# Altium PCB MXCHIP.PcbDoc
Units mil, origin at the board's own origin, x right, y up, seen from the top; angles counter-clockwise.
Board outline 1527.56 x 1062.99 mil, 2 copper layers (Top Layer, Bottom Layer); 16 components, 14 nets, 69 pads, 11 vias.
Unrouted connection lines stored in the file: 1.
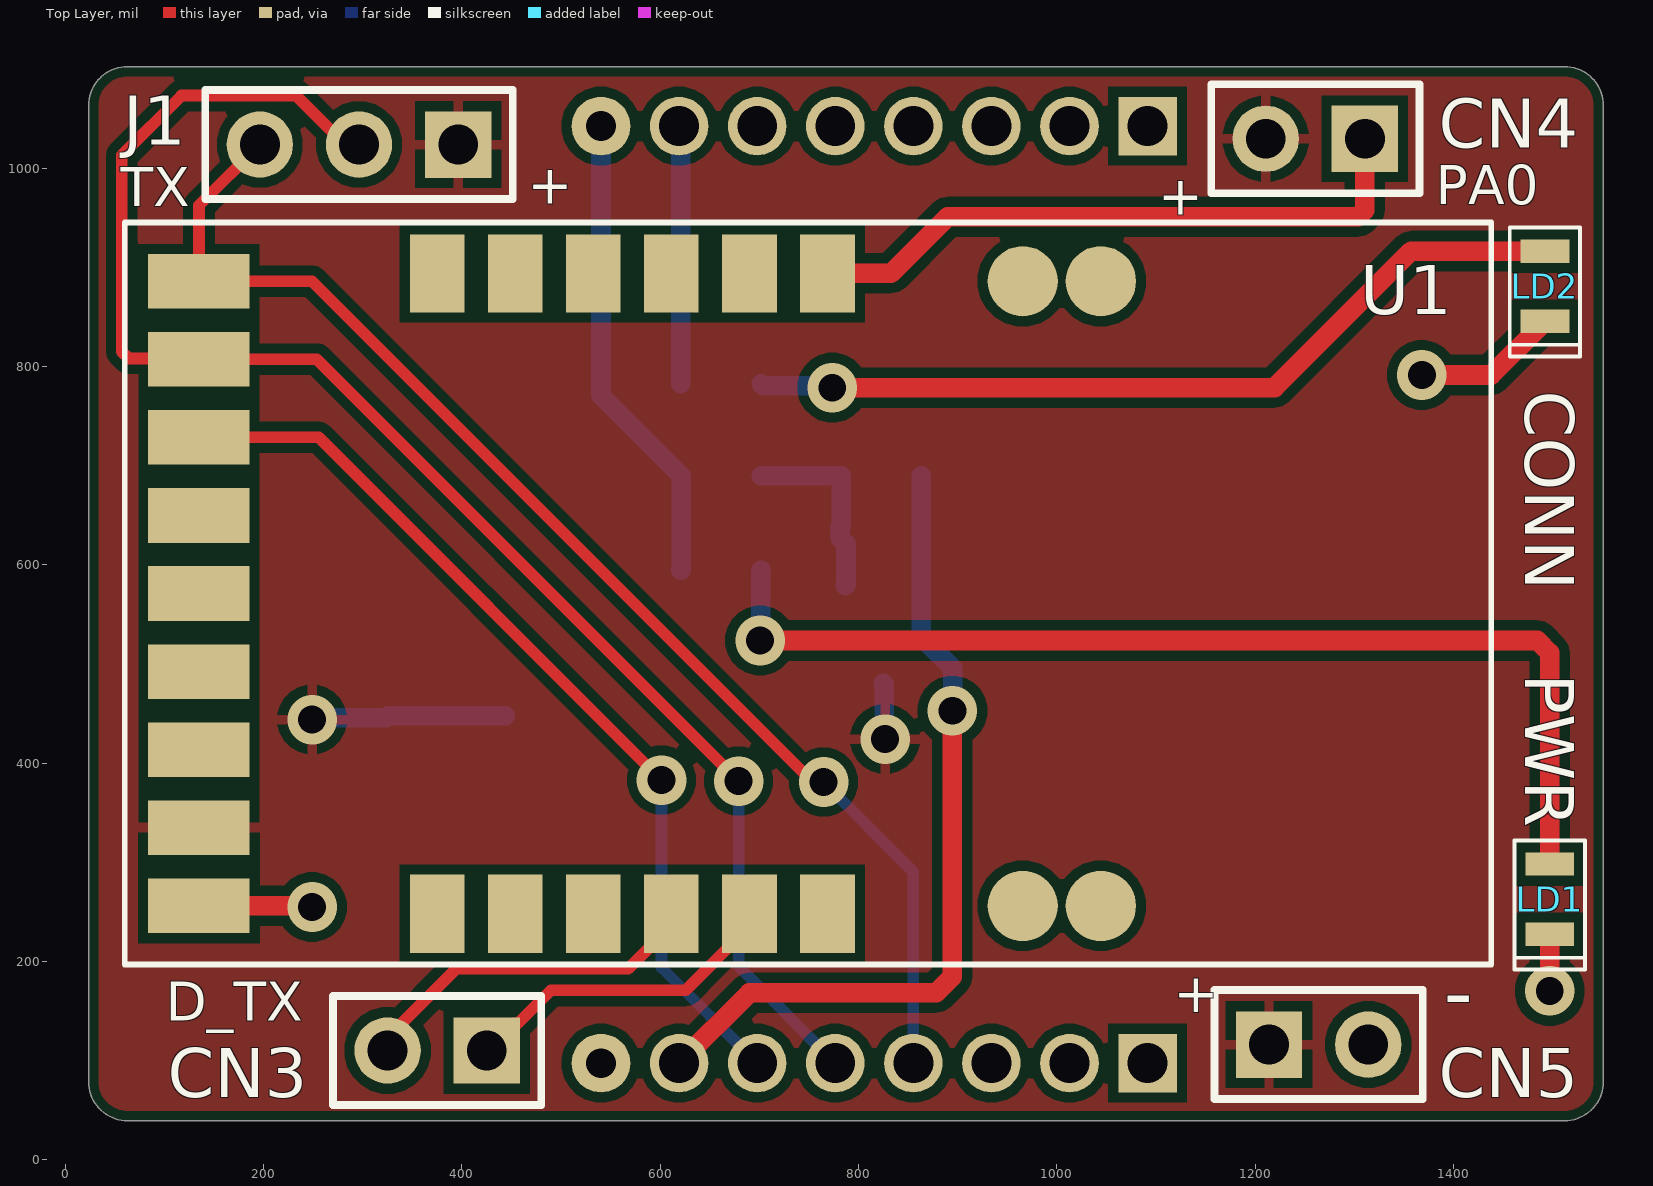
[diagram p0: Top Layer view]
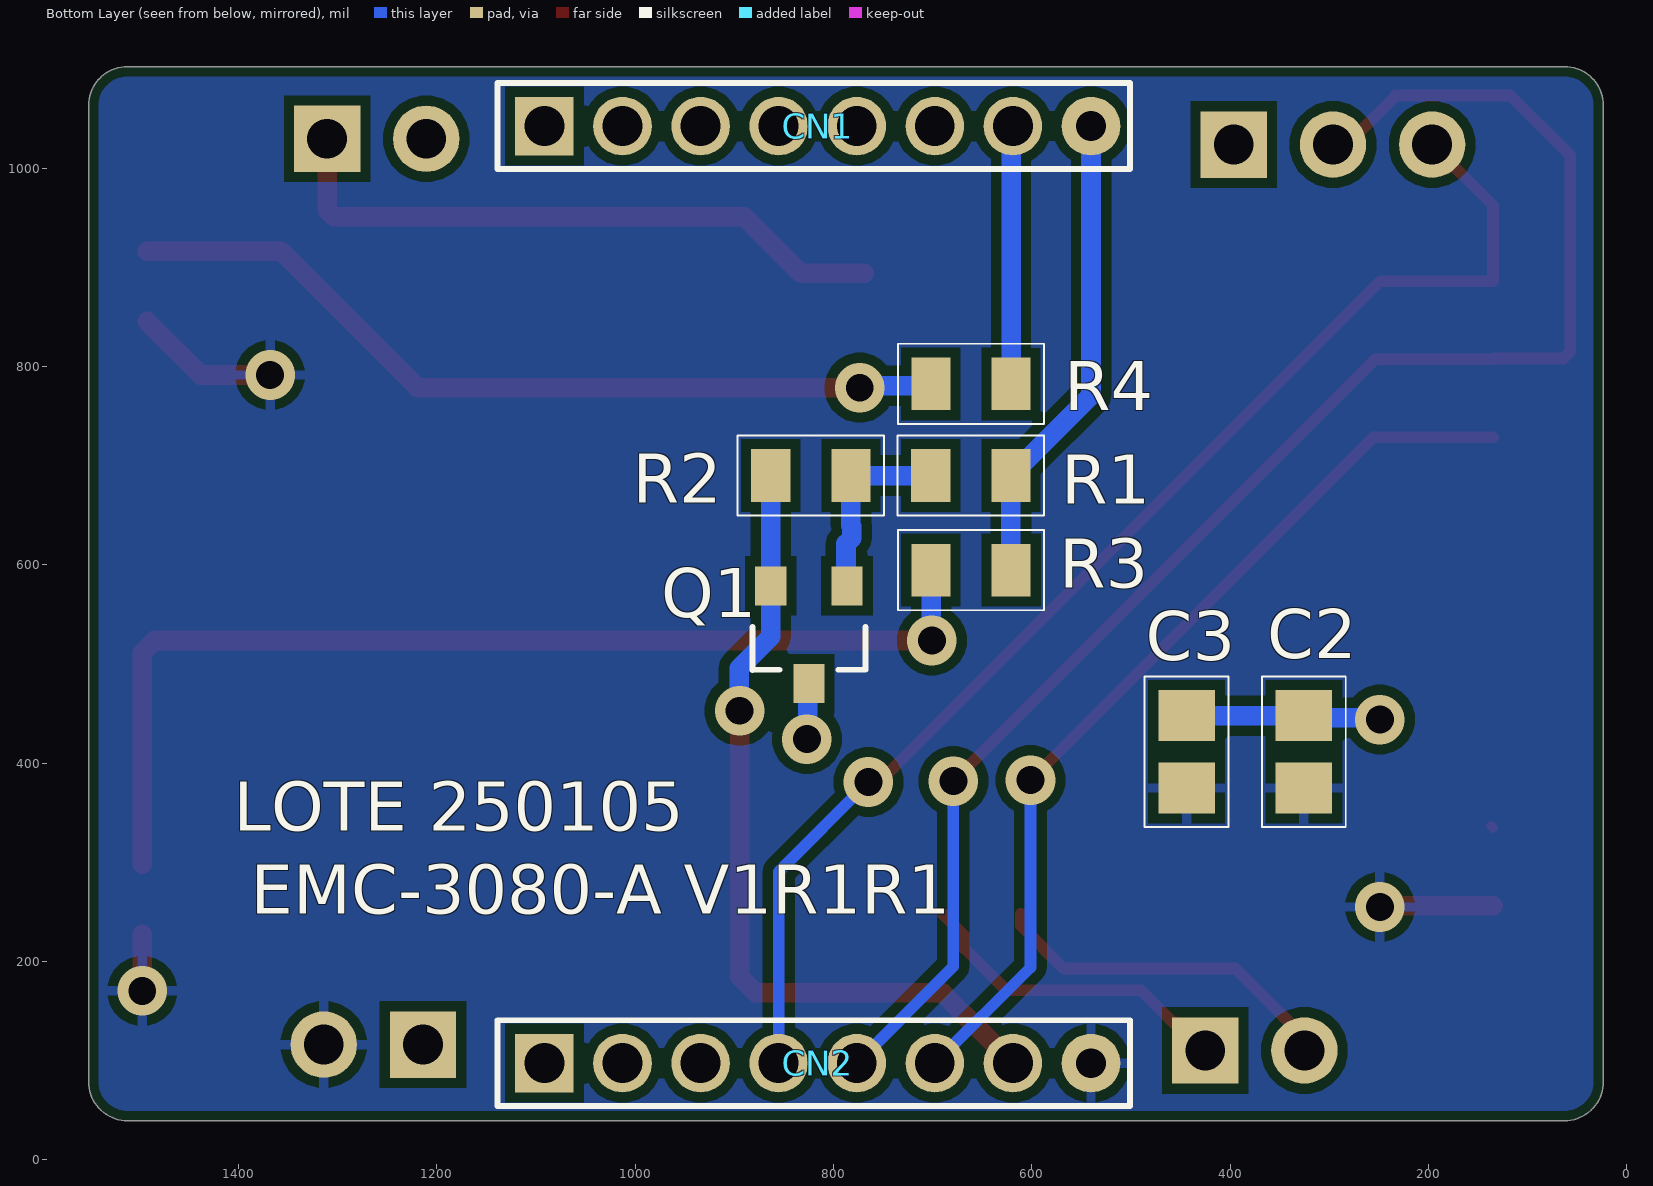
[diagram p1: Bottom Layer view, seen from below]
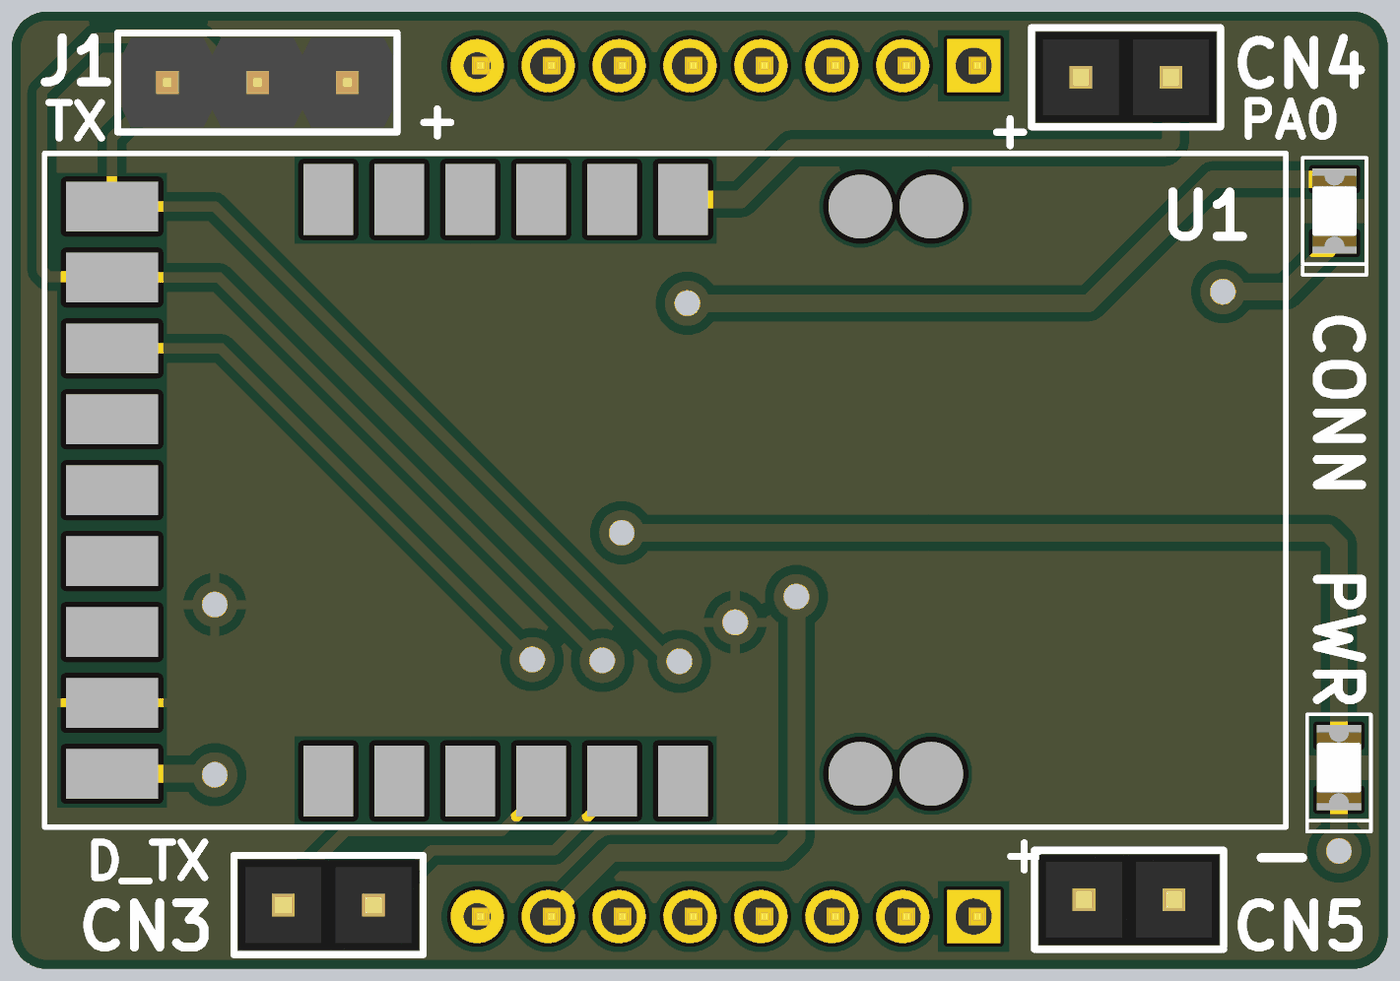
[diagram p2: 3D render of the assembled board from above, using the file's embedded part models]

## Layer stack, top to bottom
Top Solder: solder mask 0.4, Solder Resist, Dk 3.5
Top Layer: signal copper 1.4
Dielectric 1: dielectric 12.6, FR-4, Dk 4.8
Bottom Layer: signal copper 1.4
Bottom Solder: solder mask 0.4, Solder Resist, Dk 3.5

## Board outline
23.62,78.74 23.62,1062.99 cw(c62.99,1062.99) 62.99,1102.36 1511.81,1102.36 cw(c1511.81,1062.99) 1551.18,1062.99 1551.18,78.74 cw(c1511.81,78.74) 1511.81,39.37 62.99,39.37 cw(c62.99,78.74)

## Design rules (kind name [scope] priority, off if disabled: settings)
BoardOutlineClearance [All] p1: gap=9.84 ignorepadtopadclearanceinfootprint=FALSE
Clearance [All] p1: gap=10 ignorepadtopadclearanceinfootprint=FALSE except(0: Arc-Hole Track-Hole SMDPad-Hole THPad-Hole Via-Hole Fill-Hole Poly-Hole Region-Hole Text-Hole)
PolygonConnect [All] p1: connectstyle=Relief reliefconductorwidth=10 reliefentries=4 polygonreliefangle="90 Angle" airgapwidth=10
RoutingVias [All] p1: holewidth=28 width=50 viastyle="Through Hole" minholewidth=28 minwidth=50 maxholewidth=28 maxwidth=50
SilkToSilkClearance [All] p1: silktosilkclearance=5.91
SilkToSolderMaskClearance [IsPad] p1: minsilkscreentomaskgap=5.91 clearancetoexposedcopper=TRUE
SolderMaskExpansion [All] p1: expansion=4 istentingtop=FALSE
Width [All] p1: maxlimit=78.74 minlimit=7.87 preferedwidth=11.81
28 further rules are at their usual default settings.

## Components (designator, comment, footprint, x,y, rotation, side; value= is the part's Value field where it differs from the comment)
C2 "100nF" CAP_SM0805_YAGEOCC2_N 325.79,411.42 r270 bottom
C3 "4.7uF" CAP_SM0805_YAGEOCC2_N 443.9,411.42 r270 bottom
CN1 "DEALON DZ200R-11-08-39" "HEADER PIN 1X8 2mm" 815.95,1042.32 r180 bottom locked
CN2 "DEALON DZ200R-11-08-39" "HEADER PIN 1X8 2mm" 815.95,97.44 r180 bottom locked
CN3 "Completar BOM con modelo 54101-T0600LF (o equivalente), es de 36 posiciones, este componente necesita cortar 2 por componente" "HEADER PIN 1X2" 375.2,110.24 r180 top
CN4 "Completar BOM con modelo 54101-T0600LF (o equivalente), es de 36 posiciones, este componente necesita cortar 2 por componente" "HEADER PIN 1X2" 1260.63,1029.53 r180 top
CN5 "Completar BOM con modelo 54101-T0600LF (o equivalente), es de 36 posiciones, este componente necesita cortar 2 por componente" "HEADER PIN 1X2" 1263.98,116.14 r0 top
J1 "Completar BOM con modelo 54101-T0600LF (o equivalente), es de 36 posiciones, este componente necesita cortar 3 por componente" "HEADER PIN 1X3" 296.34,1023.7 r180 top
LD1 "ERROR" "LED 0805" 1497.05,262.8 r270 top
LD2 "RUN" "LED 0805" 1492.13,880.91 r270 top
Q1 "DMG3401LSN-7" DMG3401LSN-7 824.8,523.62 r270 bottom
R1 "1K" RES_SM0805_YAGEORC_N 661.5,689.96 r180 bottom
R2 "1M" RES_SM0805_YAGEORC_N 822.83,689.96 r0 bottom
R3 "2K2" RES_SM0805_YAGEORC_N 661.34,594.49 r0 bottom
R4 "2K2" RES_SM0805_YAGEORC_N 661.34,782.48 r0 bottom
U1 "EMC3080-P" EMC3080-P 589.65,570.95 r270 top locked

## Footprints (in the part's own frame and the unit in brackets; to place one, negate y for a bottom-side part, rotate by r counter-clockwise, add the part's x,y. Pads: shape width x height; smd on the part's side, far side on the other; paste and mask are expansions set on the pad)
CAP_SM0805_YAGEOCC2_N [mm] "Capacitor, Yageo CC Class2, SM0805, IPC Medium Density"
  rect 1.3x1.45 smd: 1(-0.927,0) 2(0.927,0)
  silkscreen extent -1.92,-1.07 1.92,1.07, body extent -1.1,-0.72 1.1,0.72, height 1.45
DMG3401LSN-7 [mm]
  rect 1x0.8 smd: D(1.1,0) G(-1.4,0.975) S(-1.4,-0.975)
  silkscreen extent -0.35,-1.45 0.75,1.45, body extent -1.68,-1.55 1.32,1.55, height 1.45
EMC3080-P [mm]
  round 1.8 smd mask+0.15: 1(-8,11.55) 2(-8,9.55) 24(8,9.55) 25(8,11.55)
  rect 2x1.4 smd mask+0.15: 3(-8.2,4.55) 4(-8.2,2.55) 5(-8.2,0.55) 6(-8.2,-1.45) 7(-8.2,-3.45) 8(-8.2,-5.45) 18(8.2,-5.45) 19(8.2,-3.45) 20(8.2,-1.45) 21(8.2,0.55) 22(8.2,2.55) 23(8.2,4.55)
  rect 1.4x2.6 smd mask+0.15: 9(-8,-11.55) 10(-6,-11.55) 11(-4,-11.55) 12(-2,-11.55) 13(0,-11.55) 14(2,-11.55) 15(4,-11.55) 16(6,-11.55) 17(8,-11.55)
  silkscreen extent -9.5,-13.45 9.5,21.55
"HEADER PIN 1X2" [mm]
  rect 1.7x1.7 hole 1.02: 1(-1.27,0)
  round 1.7 hole 1.02: 2(1.27,0)
  silkscreen extent -2.67,-1.4 2.67,1.4, body extent -2.54,-1.27 2.54,1.27, height 8.49
"HEADER PIN 1X3" [mm]
  rect 1.7x1.7 hole 1.02: 1(-2.54,0)
  round 1.7 hole 1.02: 2(0,0) 3(2.54,0)
  silkscreen extent -3.94,-1.4 3.94,1.4, body extent -3.81,-1.27 3.81,1.27, height 8.57
"HEADER PIN 1X8 2mm" [mm]
  rect 1.5x1.5 hole 1.02: 1(-7,0)
  round 1.5 hole 1.02: 2(-5,0) 3(-3,0) 4(-1,0) 5(1,0) 6(3,0) 7(5,0)
  round 1.5 hole 0.762: 8(7,0)
  silkscreen extent -8.2,-1.1 8,1.1, body extent -8.1,-1 7.9,1, height 5
"LED 0805" [mm]
  rect 0.6x1.25 smd: A(-0.9,0) K(0.9,0)
  silkscreen extent -1.5,-0.9 1.8,0.9, body extent -1,-0.62 1,0.62, height 1
RES_SM0805_YAGEORC_N [mm] "Resistor, Yageo RC_L, SM0805, IPC Medium Density"
  rect 1x1.35 smd: 1(-1.027,0) 2(1.027,0)
  silkscreen extent -1.88,-1.02 1.88,1.02, body extent -1.05,-0.67 1.05,0.67, height 0.6

## Part data
C2: library part CC0805KRX7R8BB104, "CAP 100nF SM0805 X7R 25V YAGEO CC2", Manufacturer=Yageo, Package=0805, Supplier Part Number 1=644249, Tolerance (%)=10, Voltage Rating (Volts)=25, Category=Capacitor, ComponentLink1Description="Manufacturer Website", ComponentLink1URL=http://www.yageo.com, Manufacturer part number=CC0805KRX7R8BB104, Supplier 1=Farnell, Supplier 2=Digi-Key, Supplier Part Number 2=311-1141-1-ND
C3: library part CC0805KRX5R6BB475, "CAP 4.7uF SM0805 X5R 10V YAGEO CC2", Manufacturer=Yageo, Package=0805, Supplier Part Number 1=718671, Tolerance (%)=10, Category=Capacitor, ComponentLink1Description="Manufacturer Website", ComponentLink1URL=http://www.yageo.com, Datasheet=https://datasheet.lcsc.com/lcsc/2304140030_YAGEO-CC0805KRX5R6BB475_C605218.pdf, Manufacturer part number=CC0805KRX5R6BB475, Supplier 1=Farnell, Supplier 2=Digi-Key, Supplier Part Number 2=311-1374-1-ND, Voltage Rating (Volts)=10
CN1 CN2: "1 x 8 - true hole  2mm - Pb free", Manufacturer="Amphenol ICC", Manufacturer part number=DZ200R-11-08-39, Temperature Max=125, Temperature Min=-65, Category="Header pin", Datasheet=https://datasheet.lcsc.com/lcsc/2202082130_Amphenol-ICC-54101-T06-00_C213463.pdf
CN3 CN4 CN5: library part 54101-T0600LF-CUT-2, "1 x 2 - true hole  2.54mm - Pb free", Manufacturer="Amphenol ICC", Temperature Max=125, Temperature Min=-65, Category="Header pin", Datasheet=https://datasheet.lcsc.com/lcsc/2202082130_Amphenol-ICC-54101-T06-00_C213463.pdf, Equivalente=B-2100S02P-A110
J1: library part 54101-T0600LF-CUT-3, "1 x 3 - true hole  2.54mm - Pb free", Manufacturer="Amphenol ICC", Manufacturer part number=54101-T0600LF, Temperature Max=125, Temperature Min=-65, Category="Header pin", Datasheet=https://datasheet.lcsc.com/lcsc/2202082130_Amphenol-ICC-54101-T06-00_C213463.pdf
LD1: library part 17-21SURC/S530-A2/TR8, Manufacturer="Everlight Elec", Category=LED, Main supplier=LCSC, Manufacturer part number=17-21SURC/S530-A2/TR8
LD2: library part 17-21/BHC-XL2M2TY/3T, Manufacturer="Everlight Elec", Manufacturer part number=17-21/BHC-XL2M2TY, Temperature Max=85, Temperature Min=-40, Category=LED, Datasheet=https://datasheet.lcsc.com/lcsc/1809192317_Everlight-Elec-17-21-BHC-XL2M2TY-3T_C72035.pdf, Main supplier=LCSC
Q1: "P-CHANNEL ENHANCEMENT MODE MOSFET / RDS(ON) = 85mΩ @ VGS = -2.5V -> ID -2.7A / V(BR)DDS 30V", Manufacturer="Diodes Incorporated", Category="Transistor mosfet", Datasheet=https://www.digikey.com/es/products/detail/diodes-incorporated/DMG3401LSN-7/3720138?s=N4IgTCBcDaICIFkDiBmALABgIwBkDKAcgLQDsIAugL5A, Manufacturer part number=DMG3401LSN-7
R1: library part RC0805FR-071KL, "RES 1K SM0805 YAGEO RC_L", Manufacturer=Yageo, Package=0805, Power (Watts)=0.125, Resistance (Ohms)=1000, Supplier Part Number 1=9237496, Tolerance (%)=1, Category=Resistor, ComponentLink1Description="Manufacturer Website", ComponentLink1URL=http://www.yageo.com, Datasheet=https://www.yageo.com/upload/media/product/app/datasheet/rchip/pyu-rc_group_51_rohs_l.pdf, Manufacturer part number=RC0805FR-071KL, Supplier 1=Farnell, Supplier 2=Digi-Key, Supplier Part Number 2=311-1.00KCRCT-ND
R2: library part RC0805FR-071ML, "RES 1M SM0805 YAGEO RC_L", Manufacturer=Yageo, Package=0805, Power (Watts)=0.125, Resistance (Ohms)=1000000, Supplier Part Number 1=9237992, Tolerance (%)=1, Category=Resistor, ComponentLink1Description="Manufacturer Website", ComponentLink1URL=http://www.yageo.com, Datasheet=https://www.yageo.com/upload/media/product/productsearch/datasheet/rchip/PYu-RC_Group_51_RoHS_L_12.pdf, Manufacturer part number=RC0805FR-071ML, Supplier 1=Farnell, Supplier 2=Digi-Key, Supplier Part Number 2=311-1.00MCRCT-ND
R3 R4: library part RC0805FR-072K2L, "RES 2K2 SM0805 YAGEO RC_L", Manufacturer=Yageo, Package=0805, Power (Watts)=0.125, Resistance (Ohms)=2200, Supplier Part Number 1=9237534, Tolerance (%)=1, Category=Resistor, ComponentLink1Description="Manufacturer Website", ComponentLink1URL=http://www.yageo.com, Manufacturer part number=RC0805FR-072K2L, Supplier 1=Farnell, Supplier 2=Digi-Key, Supplier Part Number 2=311-2.20KCRCT-ND
U1: "Solamente es el zocalo donde va montado el chip, por eso no tiene modelo 3D", Manufacturer=MXCHIP, Category="BLE Module", Datasheet=https://files.seeedstudio.com/products/113990975/EMC3080EN.pdf, Manufacturer part number=EMC3080-P

## Via types
v1: diameter 50, hole 28, Top Layer to Bottom Layer, tented both sides, 11 vias

## Nets (pads, with @x,y where several pads share a name; then routed paths per layer and width w, separated by ;. In a path a pad name is that pad's centre, name@x,y a point inside that pad or via, vN(x,y) a via of type N, cw(c..) or ccw(c..) an arc to the next point about the centre after c; other vN are vias at no path point)
DBG_RX: CN3.1 U1.22 | length 329.5
  Top Layer w11.81: CN3.1 452.76,137.8 456.69,137.8 489.92,171.02 625.8,171.02 647.61,192.84 668.39,213.61 668.39,226.46 U1.22
DBG_TX: CN3.2 U1.21 | length 357.9
  Top Layer w11.81: CN3.2 325.2,123.43 394.61,192.83 567.83,192.83 611.3,236.3 U1.21
DVDD: CN2.7 Q1.S R2.2 | length 830.5
  Top Layer w19.68: CN2.7 689.96,168.31 878.23,168.31 894.69,184.76 v1(894.69,452.76)
  Bottom Layer w19.68: R2.2 863.27,578.82 Q1.S 863.19,527.56 895.28,495.47 895.28,453.35 v1(894.69,452.76)
DVDD1: C2.1 C3.1 CN4.2 CN5.1 J1.1 Q1.D U1.16 | length 256.1
  Top Layer w10: U1.16 U1.16@136.81,336.61
  Bottom Layer w19.68: v1(249.02,443.9) 251.02,445.91 323.78,445.91 C2.1 C3.1 ; Q1.D 825.79,479.33 825.79,425.2 v1(826.77,424.21)
GND: C2.2 C3.2 CN2.8 CN5.2 LD1.K LD2.K U1.17 | length 318.1
  Top Layer w19.68: U1.17 247.95,255.98 v1(249.02,254.92) ; v1(1368.11,791.34) 1437.99,791.34 LD2.K ; v1(1497.05,170.28) LD1.K
MXC_CONNECT: CN1.7 R4.1 | length 260.6
  Bottom Layer w11.81: CN1.7 CN1.7@620.91,1040.51
  Bottom Layer w19.68: R4.1 CN1.7@620.91,1040.51
MXC_ENABLE: CN2.6 U1.11 | length 935
  Top Layer w11.81: U1.11 255.83,728.43 v1(601.38,382.87)
  Bottom Layer w11.81: v1(601.38,382.87) 601.38,193.9 CN2.6
MXC_ON: CN1.8 R1.2 R3.1 | length 481.3
  Bottom Layer w19.68: CN1.8 540.35,770.67 R1.2 621.06,594.65 R3.1
MXC_PA0: CN4.1 U1.3 | length 640.2
  Top Layer w19.68: U1.3 832.76,893.78 889.76,950.79 1303.71,950.79 1310.63,957.71 CN4.1
MXC_UART_RX: CN2.5 J1.2 U1.10 | length 1608.7
  Top Layer w11.81: J1.2 282.63,1023.7 233.26,1073.07 117.36,1073.07 57.09,1012.8 57.09,814.99 64.01,808.07 134.02,808.07 U1.10 253.86,807.17 v1(679.13,381.89)
  Bottom Layer w11.81: v1(679.13,381.89) 679.13,194.88 CN2.5
MXC_UART_TX: CN2.4 J1.3 U1.9 | length 1324.6
  Top Layer w11.81: J1.3 134.92,962.28 U1.9 248.94,885.91 753.94,380.91 v1(764.76,380.91) ; CN2.4 CN2.4@856.3,98.43
  Bottom Layer w11.81: v1(764.76,380.91) 855.32,290.35 CN2.4
NetLD1_A: LD1.A R3.2 | length 1085.6
  Top Layer w19.68: v1(700.79,523.62) 1484.53,523.62 1497.05,511.11 LD1.A
  Bottom Layer w19.68: v1(700.79,523.62) 701.28,524.11 701.28,594 R3.2
NetLD2_A: LD2.A R4.2 | length 849.1
  Top Layer w19.68: v1(773.62,778.54) 1219.49,778.54 1357.28,916.34 LD2.A
  Bottom Layer w19.68: R4.2 703.74,780.51 771.65,780.51 v1(773.62,778.54)
NetQ1_G: Q1.G R1.1 R2.1 | length 194.9
  Bottom Layer w19.68: R1.1 R2.1 782.4,639.68 781.5,638.78 781.5,626.97 787.4,621.06 787.4,579.72 Q1.G
pads on no net: CN1.1 CN1.2 CN1.3 CN1.4 CN1.5 CN1.6 CN2.1 CN2.2 CN2.3 U1.1 U1.2 U1.4 U1.5 U1.6 U1.7 U1.8 U1.12 U1.13 U1.14 U1.15 U1.18 U1.19 U1.20 U1.23 U1.24 U1.25

## Polygon pours and split planes (outlines as drawn)
GND on Bottom Layer "GND_L02_P000" (solid, pour order 0): 23.62,39.37 23.62,1102.36 1551.18,1102.36 1551.18,39.37
DVDD1 on Top Layer "DVDD1_L01_P001" (solid, pour order 1): 23.62,39.37 23.62,1102.36 1551.18,1102.36 1551.18,39.37

## Silkscreen, mask and mechanical layers (free items; w line width, h text height)
Top Overlay:
  text "+" at 466.54,963.91 h39.37
  text "PA0" at 1381.89,963.58 h39.37
  text "TX" at 56.1,961.61 h39.37
  text "+" at 1102.36,953.09 h39.37
  text "CONN" at 1472.44,775.59 h49.21 r270
  text "PWR" at 1472.44,490.16 h49.21 r270
  text "+" at 1118.11,148.95 h39.37
  text "D_TX" at 101.38,140.42 h39.37
  text "-" at 1389.92,139.46 h60
Bottom Overlay:
  text "LOTE 250105" at 1404.53,331.69 h49.21
  text "EMC-3080-A V1R1R1" at 1387.8,248.03 h49.21
Bottom Courtyard:
  lines w3.94: 23.62,78.74 ccw(c62.99,78.74) 62.99,39.37 1511.81,39.37 ccw(c1511.81,78.74) 1551.18,78.74 1551.18,1062.99 ccw(c1511.81,1062.99) 1511.81,1102.36 62.99,1102.36 ccw(c62.99,1062.99) 23.62,1062.99 23.62,78.74 ; 38.78,93.9 ccw(c78.15,93.9) 78.15,54.53 1496.65,54.53 ccw(c1496.65,93.9) 1536.02,93.9 1536.02,1047.83 ccw(c1496.65,1047.83) 1496.65,1087.2 78.15,1087.2 ccw(c78.15,1047.83) 38.78,1047.83 38.78,93.9

## Dimensions
1551.18,1102.36 to 1551.18,39.37 on Mechanical 1
23.62,1102.36 to 1551.18,1102.36 on Mechanical 1